# EAGLE board DICO_giangrandi_v100 (EAGLE 6.6.0)

Size 76.2 x 50.8 mm. Coordinates in mm from the lower left corner, seen from the top.
Outline: 0,0 76.2,0 76.2,50.8 0,50.8 0,0
Copper layers (1*16): Top 0.035mm / dielectric 1.5mm / Bottom 0.035mm
Design rules "default": minimum track width 10mil, minimum drill 24mil, track to track 8mil, track to pad 8mil, pad to pad 8mil, via to via 8mil, smd to smd 8mil, copper to edge 40mil, drill to drill 8mil, minimum pad ring 10mil, minimum via ring 8mil, stop-mask expansion 4mil, vias tented up to drill 0mil, thermal gap 10mil

## Footprints (pad centres in the part's own frame; a part is rotated, then mirrored left to right if it is on the bottom)
0805_IPC-7351B = smd 0.9 x 1.5: 1 -1,0; 2 1,0
C1812 = smd 1.9 x 3.4: 1 -1.95,0; 2 1.95,0
C1206 = smd 1.6 x 1.8: 1 -1.4,0; 2 1.4,0
SOD123 = smd 1.4 x 1.4: A 1.9,0; C -1.9,0
BNC_EDGE = smd 4.5 x 2: C 0.25,0 | smd 4.5 x 2.5: G1 0.25,4.7; G4 0.25,-4.7 | smd 4.5 x 3.5 bottom: G2 0.25,3.7; G3 0.25,-3.7
R1206 = smd 1.6 x 1.803: 1 -1.422,0; 2 1.422,0
PA1005 = smd 1.27 x 1.778: 1 -1.854,-3.429; 2 0,-3.429; 3 1.854,-3.429; 4 1.854,3.429; 5 0,3.429; 6 -1.854,3.429 | smd 2.54 x 3.048: 7 2.616,0; 8 -2.616,0

## Placement (x,y rotation side)
C1  0.1uF  [0805_IPC-7351B]  53.34,21.59 0 top
C2  0.1uF  [0805_IPC-7351B]  60.96,17.78 270 top
C3  0.1uF  [0805_IPC-7351B]  21.59,20.32 180 top
C4  0.1uF  [0805_IPC-7351B]  12.7,16.51 270 top
C5  0.1uF  [C1812]  29.21,30.48 0 top
C6  0.1uF  [C1812]  48.26,30.48 0 top
C7  22nF  [C1206]  -11.43,-17.78 0 top  (outside the outline)
C8  22nF  [C1206]  -11.43,-24.13 0 top  (outside the outline)
D1  [SOD123]  55.88,17.78 270 top
D2  [SOD123]  58.42,21.59 180 top
D3  [SOD123]  19.05,15.24 270 top
D4  [SOD123]  16.51,20.32 0 top
J1  [BNC_EDGE]  2.54,30.48 0 top
J2  [BNC_EDGE]  15.24,2.54 90 top
J3  [BNC_EDGE]  73.66,30.48 180 top
J4  [BNC_EDGE]  58.42,2.54 90 top
R1  1K  [R1206]  44.45,17.78 270 top
R2  1K  [R1206]  46.99,17.78 270 top
R3  1K  [R1206]  48.26,21.59 0 top
R4  1K  [R1206]  48.26,24.13 0 top
R5  1K  [R1206]  50.8,17.78 270 top
R6  1K  [R1206]  53.34,17.78 270 top
R7  1K  [R1206]  58.42,17.78 270 top
R8  1K  [R1206]  31.75,16.51 270 top
R9  1K  [R1206]  29.21,16.51 270 top
R10  1K  [R1206]  27.94,22.86 180 top
R11  1K  [R1206]  27.94,20.32 180 top
R12  1K  [R1206]  25.4,16.51 270 top
R13  1K  [R1206]  22.86,16.51 270 top
R14  1K  [R1206]  15.24,16.51 270 top
T1  TRAFO_CURRENTSENSEPA1005.020QNLPA1005  [PA1005]  38.1,30.48 0 top
T2  TRAFO_CURRENTSENSEPA1005.020QNLPA1005  [PA1005]  38.1,19.05 180 top

## Library data of the parts
C1-C4 = MDT_C; PACKAGE: 0805; VOLTAGE: 16V
C5 C6 = MDT_C; PACKAGE: 1812; VOLTAGE: 16V
C7 C8 = MDT_C; BOM: INCLUDE; DIALECTRIC: NP0; PACKAGE: 1206; PARTNO: C3216NP02E223J160AA; TOL: 5; VOLTAGE: 250V
D1-D4 = diode
J1-J4 = MDT_CON
R1-R14 = MDT_R; PACKAGE: 1206; POWER: 0.25; TOL: 1%
T1 T2 = MDT_TRAFO; BOM: INCLUDE; PACKAGE: SMD; PARTNO: PA1005.020QNL; RATIO: 1:20

## Nets
GND: C2.2 C4.2 D1.A D3.A J1.G1 J1.G2 J1.G3 J1.G4 J2.G1 J2.G2 J2.G3 J2.G4 J3.G1 J3.G2 J3.G3 J3.G4 J4.G1 J4.G2 J4.G3 J4.G4 R1.2 R2.2 R5.2 R6.2 R7.2 R8.2 R9.2 R12.2 R13.2 R14.2 T1.1 T2.3
N$1: C7.2 R8.1 R9.1 R10.1 R11.1 T1.3 T2.7
N$2: C5.2 C7.1 T1.8
N$3: C6.1 C8.1 T1.7 T2.1
N$4: C5.1 J1.C
N$5: C1.1 R3.2 R4.2 R5.1 R6.1
N$6: C1.2 D1.C D2.A
N$7: C2.1 D2.C J4.C R7.1
N$8: C8.2 R1.1 R2.1 R3.1 R4.1 T2.8
N$9: C3.1 R10.2 R11.2 R12.1 R13.1
N$10: C3.2 D3.C D4.A
N$11: C4.1 D4.C J2.C R14.1
N$12: C6.2 J3.C

## Tracks (layer width: path | path; a pad name or v marks a point on that pad's centre or on a via)
GND  (31 unrouted)
N$1  (6 unrouted)
N$2  (2 unrouted)
N$3  (3 unrouted)
N$4  (1 unrouted)
N$5  (4 unrouted)
N$6  (2 unrouted)
N$7  (3 unrouted)
N$8  (5 unrouted)
N$9  (4 unrouted)
N$10  (2 unrouted)
N$11  (3 unrouted)
N$12  (1 unrouted)